# EAGLE board SchematicInkTimePCB (EAGLE 9.7.0)
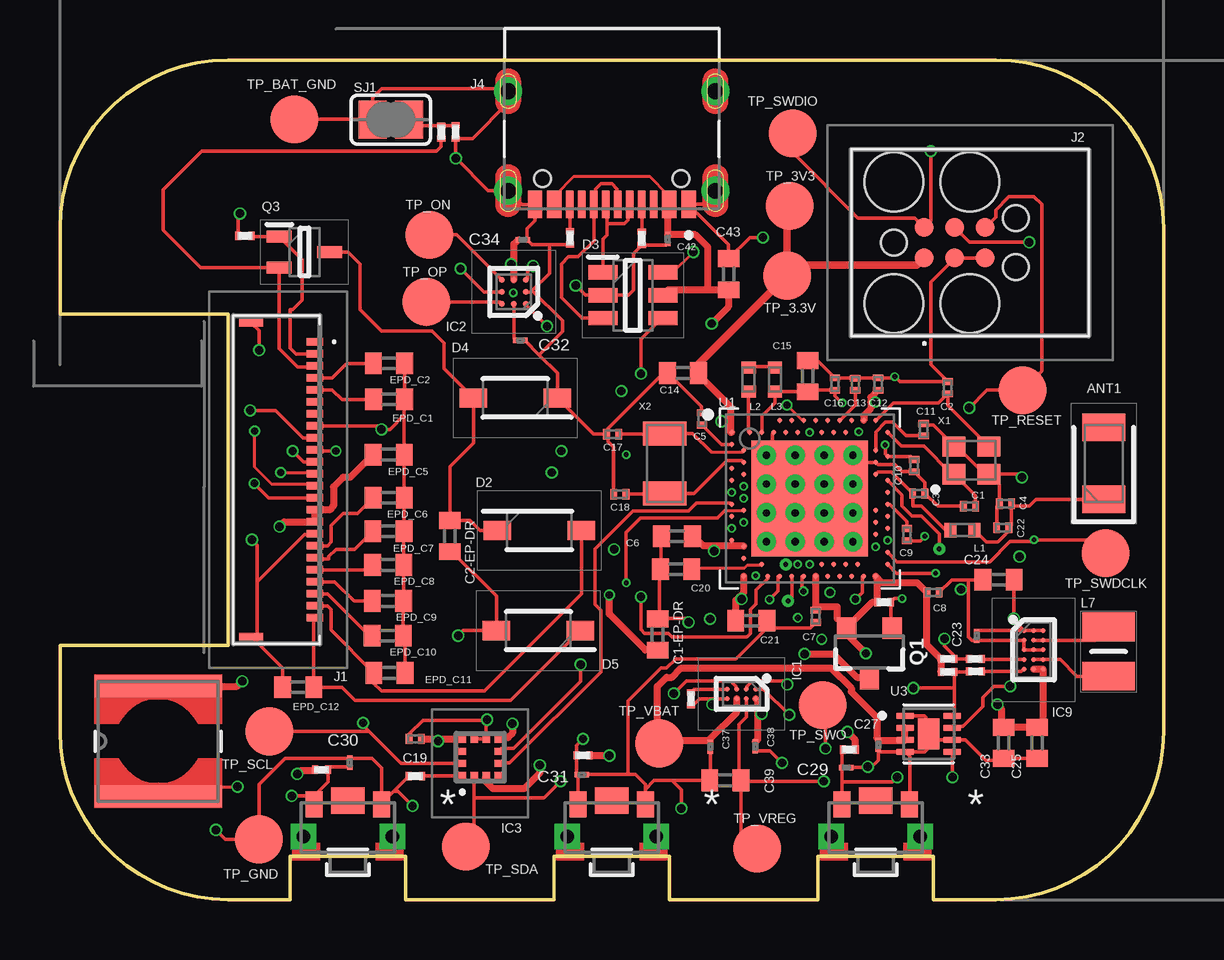
[diagram p0: board, top side]
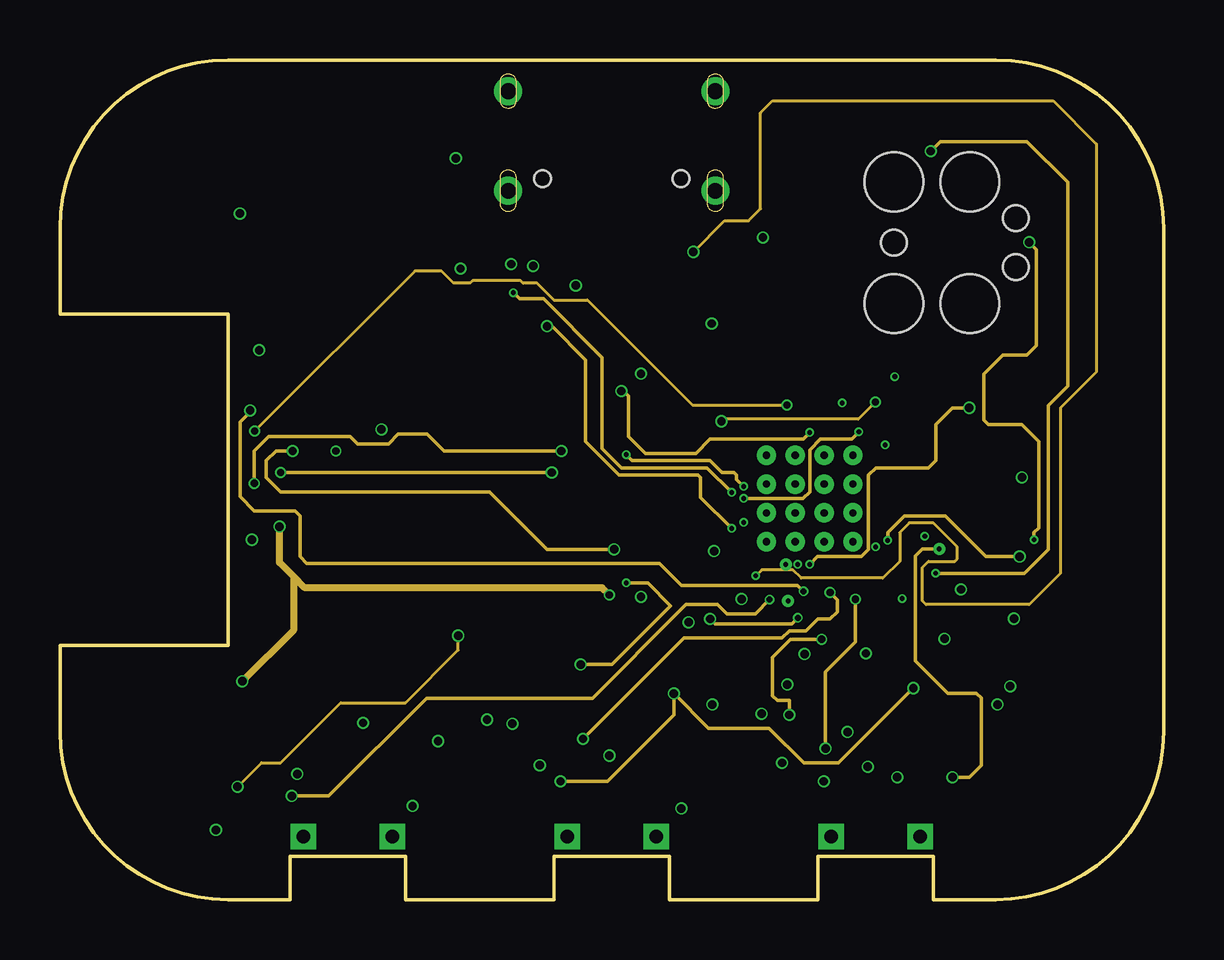
[diagram p1: board, inner layer Route2]
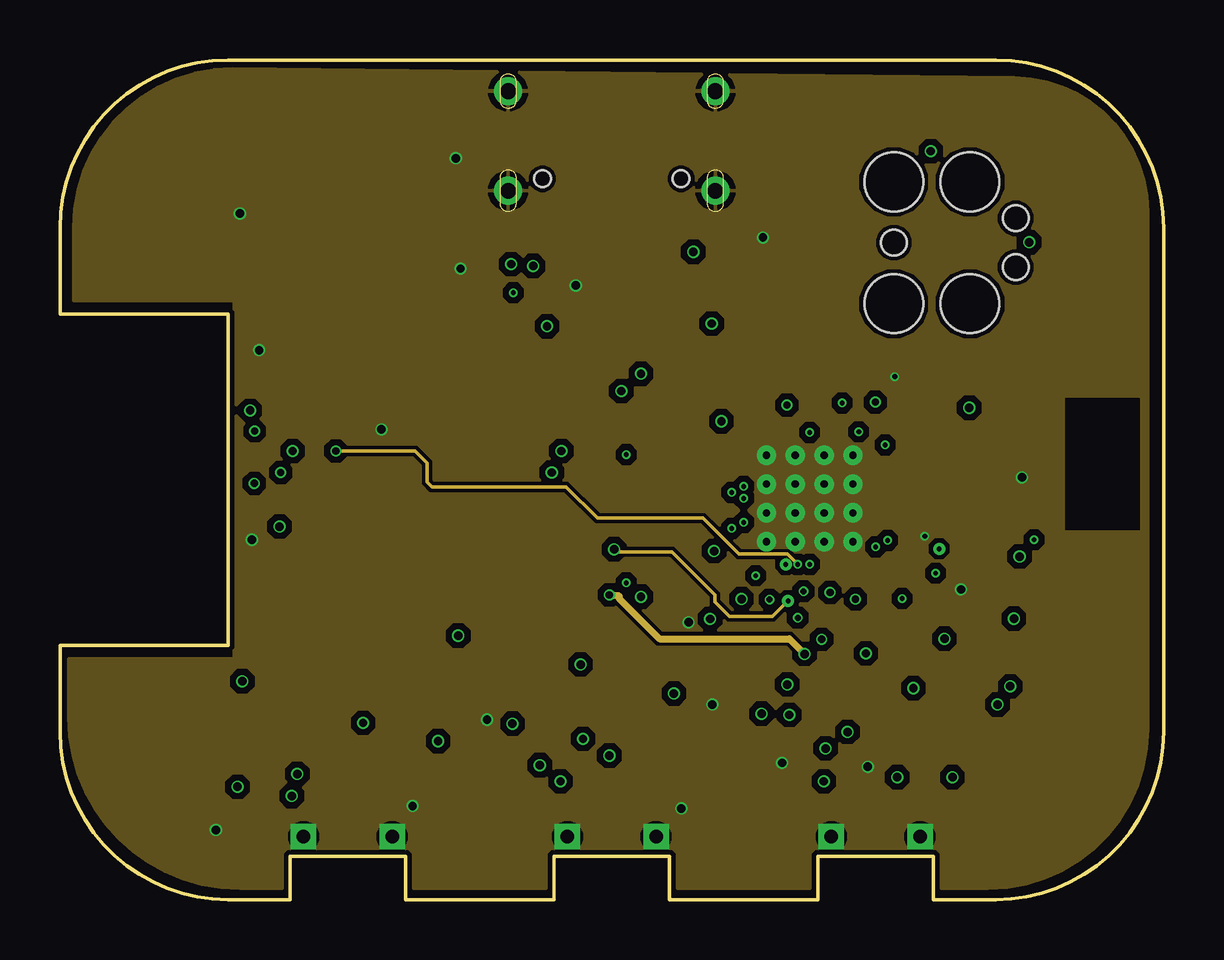
[diagram p2: board, inner layer Route63]
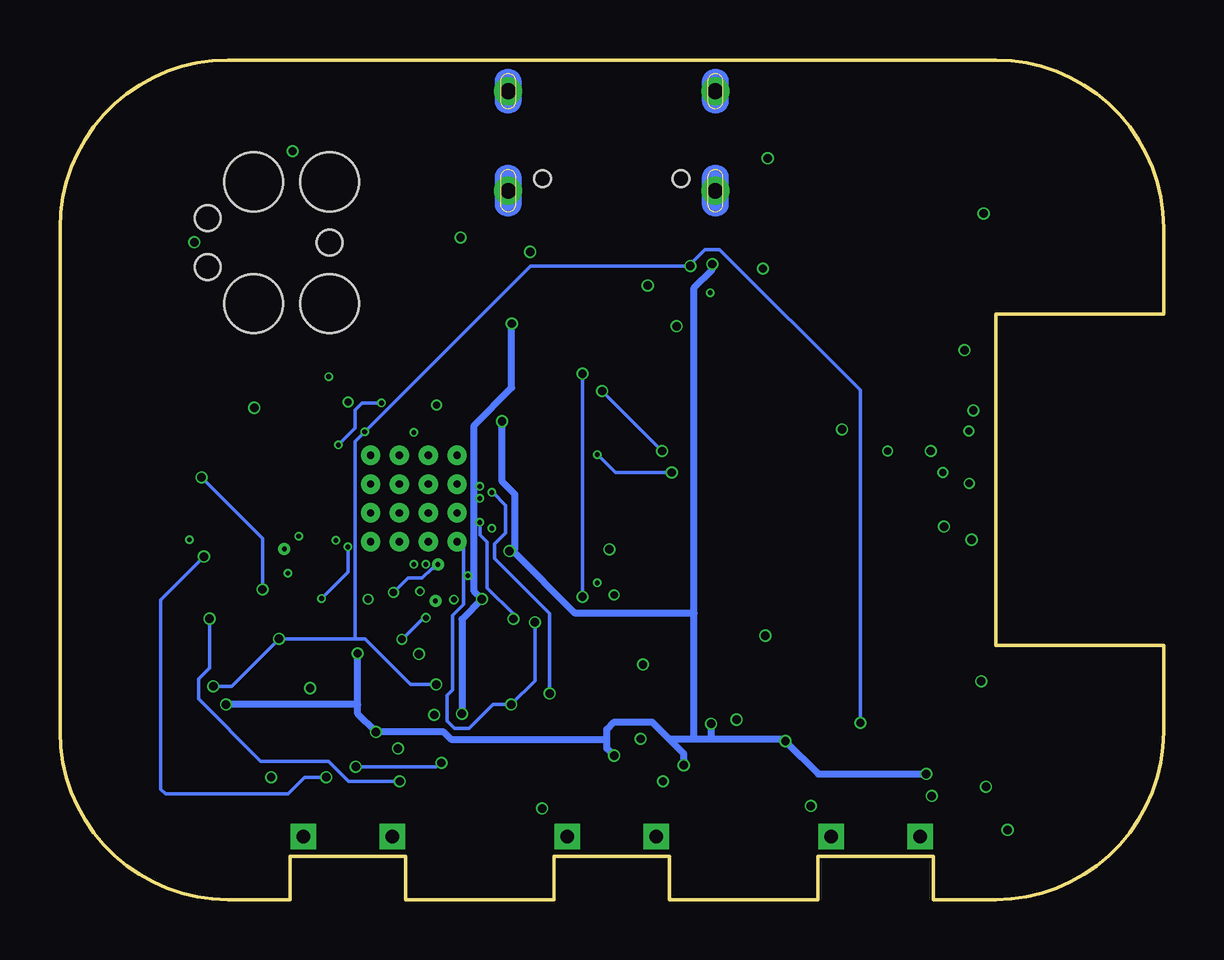
[diagram p3: board, bottom side, seen from below]

Size 46 x 35 mm. Coordinates in mm from the lower left corner, seen from the top.
Outline: 39,0 36.4,0 36.4,1.8 31.6,1.8 31.6,0 25.4,0 25.4,1.8 20.6,1.8 20.6,0 14.4,0 14.4,1.8 9.6,1.8 9.6,0 7,0 arc-90 0,7 0,10.6 7,10.6 7,24.4 0,24.4 0,28 arc-90 7,35 39,35 arc-90 46,28 46,7 arc-90 39,0
Copper layers (1+2*15+16): Top / Route2 / Route63 / Bottom
Stack-up 4 Layer Stack: Top SilkScreen Epoxy Ink / Top SolderMask SR:Green 0.0254mm Dk 4.3 / Top Surface Finish Lead-Free 0.02mm / Top User Defined 0.0151mm / Dielectric-1 User Defined 0.075mm / Dielectric-2 User Defined 0.075mm / Route2 User Defined 0.0145mm / Dielectric-3 User Defined 0.55mm / Route63 User Defined 0.0145mm / Dielectric-4 User Defined 0.075mm / Dielectric-5 User Defined 0.075mm / Bottom User Defined 0.0151mm / Bottom Surface Finish Lead-Free 0.02mm / Bottom SolderMask SR:Green 0.0254mm Dk 4.3 / Bottom SilkScreen Epoxy Ink
Design rules: minimum copper width 5mil, minimum drill size 0.2mm, copper clearance wire_polygon to wire_polygon 0.1mm, copper clearance wire_polygon to pad_smd 0.08mm, copper clearance wire_polygon to via 0.1mm, copper clearance pad_smd to pad_smd 5mil, copper clearance pad_smd to via 5mil, copper clearance via to via 5mil, copper clearance smd to pad (same net) 5mil, copper clearance smd to via (same net) 5mil, copper clearance smd to smd (same net) 5mil, dimension clearance 0.2mm, via restrict clearance 0mil, restrict clearance 0mil, drill distance 6mil, keepout clearance 0mil

## Footprints (pad centres in the part's own frame; a part is rotated, then mirrored left to right if it is on the bottom)
2450AT18B100E_ANTC3216X140N = smd 1.15 x 1.8: 1 -1.5,0; 2 1.5,0
NORDIC_NRF_3_RESC0201_L = smd 0.28 x 0.43: 1 -0.255,0; 2 0.255,0
ESP32_C6_LIBRARY_1_ESP32_WROVER_EAGLE-LTSPICE_C0402 = smd 0.7 x 0.9: 1 -0.65,0; 2 0.65,0
GRM011R60J152KE01L_2_CAPC0201X13N = smd 0.22 x 0.23: 1 -0.185,0; 2 0.185,0
ESP32_C6_LIBRARY_5_SOD3716X135N = smd 1.15 x 0.8: 1 -1.75,0; 2 1.75,0
ESP32_C6_LIBRARY_3_SOT95P280X145-6N = smd 1.2 x 0.6: 1 -1.25,0.95; 2 -1.25,0; 3 -1.25,-0.95; 4 1.25,-0.95; 5 1.25,0; 6 1.25,0.95
BQ25180YBGR_BGA8C40P2X4_100X155X50 = smd 0.2 x 0.2: A1 -0.2,0.6; A2 0.2,0.6; B1 -0.2,0.2; B2 0.2,0.2; C1 -0.2,-0.2; C2 0.2,-0.2; D1 -0.2,-0.6; D2 0.2,-0.6
DRV2605YZFR_BGA9C50P3X3_144X144X62 = smd 0.25 x 0.25: A1 -0.5,0.5; A2 0,0.5; A3 0.5,0.5; B1 -0.5,0; B2 0,0; B3 0.5,0; C1 -0.5,-0.5; C2 0,-0.5; C3 0.5,-0.5
BMA423_BMA423 = smd 0.3 x 0.35: 1 -0.75,-0.775; 2 -0.25,-0.775; 3 0.25,-0.775; 4 0.75,-0.775; 7 0.75,0.775; 8 0.25,0.775; 9 -0.25,0.775; 10 -0.75,0.775 | smd 0.35 x 0.3: 5 0.775,-0.25; 6 0.775,0.25; 11 -0.775,0.25; 12 -0.775,-0.25
RT6160AWSC_BGA15C40P3X5_140X230X60 = smd 0.216 x 0.216: A1 -0.4,0.8; A2 0,0.8; A3 0.4,0.8; B1 -0.4,0.4; B2 0,0.4; B3 0.4,0.4; C1 -0.4,0; C2 0,0; C3 0.4,0; D1 -0.4,-0.4; D2 0,-0.4; D3 0.4,-0.4; E1 -0.4,-0.8; E2 0,-0.8; E3 0.4,-0.8
503480-2400_5034802400 = smd 0.3 x 0.7: 1 -5.75,1.525; 2 -5.25,1.525; 3 -4.75,1.525; 4 -4.25,1.525; 5 -3.75,1.525; 6 -3.25,1.525; 7 -2.75,1.525; 8 -2.25,1.525; 9 -1.75,1.525; 10 -1.25,1.525; 11 -0.75,1.525; 12 -0.25,1.525; 13 0.25,1.525; 14 0.75,1.525; 15 1.25,1.525; 16 1.75,1.525; 17 2.25,1.525; 18 2.75,1.525; 19 3.25,1.525; 20 3.75,1.525; 21 4.25,1.525; 22 4.75,1.525; 23 5.25,1.525; 24 5.75,1.525 | smd 0.3 x 1: MP1 -6.54,-1.125; MP2 6.54,-1.125
TC2030-IDC_TC2030IDC = smd 0.783 x 0.783: 1 -0.953,-0.635; 2 -0.953,0.635; 3 0.317,-0.635; 4 0.317,0.635; 5 1.588,-0.635; 6 1.588,0.635 | hole 2.451: -2.223,-2.54; -2.223,2.54; 0.952,-2.54; 0.952,2.54 | hole 1.067: -2.223,0; 2.857,-1.016; 2.857,1.016
KH-TYPE-C-16P_KINGHELM_KH-TYPE-C-16P = smd 0.6 x 1.15: A1_B12 -3.2,4.725; A4_B9 -2.4,4.725; A9_B4 2.4,4.725; A12_B1 3.2,4.725 | smd 0.3 x 1.15: A5 -1.25,4.725; A6 -0.25,4.725; A7 0.25,4.725; A8 1.25,4.725; B5 1.75,4.725; B6 0.75,4.725; B7 -0.75,4.725; B8 -1.75,4.725 | drill 0.65 pad 1.05: SH1 -4.32,0; SH2 4.32,0; SH3 -4.32,4.15; SH4 4.32,4.15 | hole 0.7: -2.89,3.65; 2.89,3.65
NORDIC_NRF_2_RESC0402_L = smd 0.5 x 0.6: 1 -0.5,0; 2 0.5,0
ESP32_C6_LIBRARY_2_IND_4828-WE-TPC_WRE = smd 0.9 x 5.3: 1 -2.286,0; 2 2.286,0
MLP2016SR47MT0S1_INDC2016X100N = smd 1.2 x 2.2: 1 -1.028,0; 2 1.028,0
ESP32_C6_LIBRARY_4_ESP32_C6_LIBRARY_4_ESP32_C6_LIBRARY_4_ESP32_C6_LIBRARY_4_ESP32_WROVER_SPARKFUN-DISCRETESEMI_SOT23-3 = smd 0.8 x 0.9: 1 -0.95,-1; 2 0.95,-1; 3 0,1.1
ESP32_C6_LIBRARY_6_SOT65P210X110-3N = smd 1.05 x 0.5: 1 -1.05,0.65; 2 -1.05,-0.65; 3 1.05,0
CPF0201D7K68C1_0201 = smd 0.35 x 0.25: 1 0,0.275; 2 0,-0.275
ERA-1AEB3401C_0201 = smd 0.35 x 0.25: 1 0,0.275; 2 0,-0.275
ESP32_C6_LIBRARY_7_JUMPER_SJ = smd 1.168 x 1.6: 1 -0.762,0; 2 0.762,0
2025-10-22_07-23-44_LIBRARY_SW_EVP-AKE31A_PAN = smd 0.711 x 1.092: 1 -1.4,-0.972; 2 1.4,-0.972 | drill 0.559 pad 0.914 square: 3 -1.848,0.381; 4 1.848,0.381 | smd 1.397 x 1.092: 5 0,-1.124
HECTOR_WATCH_1_TP20R = smd 2 x 2: TP 0,0
NORDIC_NRF_4_AQFN50P700X700X85_HS-74N = smd 4.85 x 4.85: P$74 0,0 | drill 0.3 pad 0.6: P$75 -1.8,1.8; P$76 -0.6,1.8; P$77 0.6,1.8; P$78 1.8,1.8; P$79 -1.8,0.6; P$80 -0.6,0.6; P$81 0.6,0.6; P$82 1.8,0.6; P$83 -1.8,-0.6; P$84 -0.6,-0.6; P$85 0.6,-0.6; P$86 1.8,-0.6; P$87 -1.8,-1.8; P$88 -0.6,-1.8; P$89 0.6,-1.8; P$90 1.8,-1.8 | smd 0.2 x 0.2: P$A8 -1.25,3.25; P$A10 -0.75,3.25; P$A12 -0.25,3.25; P$A14 0.25,3.25; P$A16 0.75,3.25; P$A18 1.25,3.25; P$A20 1.75,3.25; P$A22 2.25,3.25; P$A23 2.75,3.25; P$AA24 3.25,-2.25; P$AB2 -2.75,-2.5; P$AC5 -2,-2.75; P$AC9 -1,-2.75; P$AC11 -0.5,-2.75; P$AC13 0,-2.75; P$AC15 0.5,-2.75; P$AC17 1,-2.75; P$AC19 1.5,-2.75; P$AC21 2,-2.75; P$AC24 3.25,-2.75; P$AD2 -2.75,-3.25; P$AD4 -2.25,-3.25; P$AD6 -1.75,-3.25; P$AD8 -1.25,-3.25; P$AD10 -0.75,-3.25; P$AD12 -0.25,-3.25; P$AD14 0.25,-3.25; P$AD16 0.75,-3.25; P$AD18 1.25,-3.25; P$AD20 1.75,-3.25; P$AD22 2.25,-3.25; P$AD23 2.75,-3.25; P$B1 -3.25,2.75; P$B3 -2.5,2.75; P$B5 -2,2.75; P$B7 -1.5,2.75; P$B9 -1,2.75; P$B11 -0.5,2.75; P$B13 0,2.75; P$B15 0.5,2.75; P$B17 1,2.75; P$B19 1.5,2.75; P$B24 3.25,2.75; P$C1 -3.25,2.25; P$D2 -2.75,2; P$D23 2.75,2; P$E24 3.25,1.75; P$F2 -2.75,1.5; P$F23 2.75,1.5; P$G1 -3.25,1.25; P$H2 -2.75,1; P$H23 2.75,1; P$J1 -3.25,0.75; P$J24 3.25,0.75; P$K2 -2.75,0.5; P$L1 -3.25,0.25; P$L24 3.25,0.25; P$M2 -2.75,0; P$N1 -3.25,-0.25; P$N24 3.25,-0.25; P$P2 -2.75,-0.5; P$P23 2.75,-0.5; P$R1 -3.25,-0.75; P$R24 3.25,-0.75; P$T2 -2.75,-1; P$T23 2.75,-1; P$U1 -3.25,-1.25; P$U24 3.25,-1.25; P$V23 2.75,-1.5; P$W1 -3.25,-1.75; P$W24 3.25,-1.75; P$Y2 -2.75,-2; P$Y23 2.75,-2
ESP32_C6_LIBRARY_SON50P200X200X80-9N = smd 0.76 x 0.27: 1 -0.985,0.75; 2 -0.985,0.25; 3 -0.985,-0.25; 4 -0.985,-0.75; 5 0.985,-0.75; 6 0.985,-0.25; 7 0.985,0.25; 8 0.985,0.75 | smd 0.9 x 1.3: 9 0,0
NORDIC_NRF_BT-XTAL_2016_N = smd 0.95 x 0.85: 1 -0.725,-0.575; 2 0.725,-0.575; 3 0.725,0.575; 4 -0.725,0.575
NORDIC_NRF_1_XTAL_3215_N = smd 1 x 1.8: 1 -1.25,0; 2 1.25,0

## Placement (x,y rotation side)
ANT1  2450AT18B100E  [2450AT18B100E_ANTC3216X140N]  43.51,18.18 90 top
C1  12pF  [NORDIC_NRF_3_RESC0201_L]  37.91,16.4 180 top
C1-EP-DR  10uF  [ESP32_C6_LIBRARY_1_ESP32_WROVER_EAGLE-LTSPICE_C0402]  24.91,11.05 90 top
C2  12pF  [NORDIC_NRF_3_RESC0201_L]  37,21.34 90 top
C2-EP-DR  4.7uF/25V  [ESP32_C6_LIBRARY_1_ESP32_WROVER_EAGLE-LTSPICE_C0402]  16.25,15.15 270 top
C3  1pF  [NORDIC_NRF_3_RESC0201_L]  35.8,16.93 0 top
C4  1pF  [NORDIC_NRF_3_RESC0201_L]  39.41,16.5 180 top
C5  100nF  [NORDIC_NRF_3_RESC0201_L]  26.76,20.04 90 top
C6  4.7uF  [ESP32_C6_LIBRARY_1_ESP32_WROVER_EAGLE-LTSPICE_C0402]  25.72,15.15 180 top
C7  100nF  [NORDIC_NRF_3_RESC0201_L]  31.5,11.81 270 top
C8  100nF  [NORDIC_NRF_3_RESC0201_L]  36.39,12.8 0 top
C9  820pF  [NORDIC_NRF_3_RESC0201_L]  35.3,15.21 270 top
C10  N.C.  [NORDIC_NRF_3_RESC0201_L]  35.6,18.09 270 top
C11  100pF  [NORDIC_NRF_3_RESC0201_L]  36,19.59 90 top
C12  100nF  [NORDIC_NRF_3_RESC0201_L]  34.1,21.49 90 top
C13  N.C.  [NORDIC_NRF_3_RESC0201_L]  33.15,21.48 90 top
C14  4.7uF  [ESP32_C6_LIBRARY_1_ESP32_WROVER_EAGLE-LTSPICE_C0402]  25.97,21.95 180 top
C15  1.0uF  [ESP32_C6_LIBRARY_1_ESP32_WROVER_EAGLE-LTSPICE_C0402]  31.17,21.82 90 top
C16  47nF  [NORDIC_NRF_3_RESC0201_L]  32.3,21.49 90 top
C17  12pF  [NORDIC_NRF_3_RESC0201_L]  23.04,19.4 0 top
C18  12pF  [NORDIC_NRF_3_RESC0201_L]  23.34,16.9 0 top
C19  100nF  [NORDIC_NRF_3_RESC0201_L]  14.81,6.7 180 top
C20  4.7uF  [ESP32_C6_LIBRARY_1_ESP32_WROVER_EAGLE-LTSPICE_C0402]  25.68,13.77 180 top
C21  4.7uF  [ESP32_C6_LIBRARY_1_ESP32_WROVER_EAGLE-LTSPICE_C0402]  28.82,11.63 0 top
C22  N.C.  [NORDIC_NRF_3_RESC0201_L]  39.3,15.5 180 top
C23  0.1uF  [GRM011R60J152KE01L_2_CAPC0201X13N]  38.21,10.99 90 top
C24  10uF  [ESP32_C6_LIBRARY_1_ESP32_WROVER_EAGLE-LTSPICE_C0402]  39.12,13.33 0 top
C25  22uF  [ESP32_C6_LIBRARY_1_ESP32_WROVER_EAGLE-LTSPICE_C0402]  40.73,6.53 270 top
C27  0.1uF  [GRM011R60J152KE01L_2_CAPC0201X13N]  34.11,6.45 90 top
C29  1uF  [GRM011R60J152KE01L_2_CAPC0201X13N]  32.77,5.51 180 top
C30  1uF  [GRM011R60J152KE01L_2_CAPC0201X13N]  12.09,5.71 270 top
C31  1uF  [GRM011R60J152KE01L_2_CAPC0201X13N]  21.75,5.21 180 top
C32  1uF  [GRM011R60J152KE01L_2_CAPC0201X13N]  19.19,23.31 180 top
C33  22uF  [ESP32_C6_LIBRARY_1_ESP32_WROVER_EAGLE-LTSPICE_C0402]  39.33,6.53 270 top
C34  0.1uF  [GRM011R60J152KE01L_2_CAPC0201X13N]  19.29,27.51 180 top
C37  1uF  [GRM011R60J152KE01L_2_CAPC0201X13N]  27.11,6.37 90 top
C38  1uF  [GRM011R60J152KE01L_2_CAPC0201X13N]  28.98,6.39 90 top
C39  10uF  [ESP32_C6_LIBRARY_1_ESP32_WROVER_EAGLE-LTSPICE_C0402]  27.73,4.97 180 top
C42  0.1uF  [GRM011R60J152KE01L_2_CAPC0201X13N]  25.34,27.53 270 top
C43  4.7uF  [ESP32_C6_LIBRARY_1_ESP32_WROVER_EAGLE-LTSPICE_C0402]  27.87,26.07 90 top
D2  MBR0530  [ESP32_C6_LIBRARY_5_SOD3716X135N]  19.98,15.39 0 top
D3  USBLC6-2SC6Y  [ESP32_C6_LIBRARY_3_SOT95P280X145-6N]  23.88,25.19 0 top
D4  MBR0530  [ESP32_C6_LIBRARY_5_SOD3716X135N]  18.98,20.91 180 top
D5  MBR0530  [ESP32_C6_LIBRARY_5_SOD3716X135N]  19.94,11.21 180 top
EPD_C1  1uF/50V  [ESP32_C6_LIBRARY_1_ESP32_WROVER_EAGLE-LTSPICE_C0402]  13.72,20.85 180 top
EPD_C2  1uF/50V  [ESP32_C6_LIBRARY_1_ESP32_WROVER_EAGLE-LTSPICE_C0402]  13.71,22.35 180 top
EPD_C5  0.1uF/50V  [ESP32_C6_LIBRARY_1_ESP32_WROVER_EAGLE-LTSPICE_C0402]  13.7,18.55 180 top
EPD_C6  1uF/50V  [ESP32_C6_LIBRARY_1_ESP32_WROVER_EAGLE-LTSPICE_C0402]  13.7,16.75 180 top
EPD_C7  1uF/50V  [ESP32_C6_LIBRARY_1_ESP32_WROVER_EAGLE-LTSPICE_C0402]  13.69,15.35 180 top
EPD_C8  1uF/50V  [ESP32_C6_LIBRARY_1_ESP32_WROVER_EAGLE-LTSPICE_C0402]  13.68,13.95 180 top
EPD_C9  1uF/50V  [ESP32_C6_LIBRARY_1_ESP32_WROVER_EAGLE-LTSPICE_C0402]  13.67,12.45 180 top
EPD_C10  1uF/50V  [ESP32_C6_LIBRARY_1_ESP32_WROVER_EAGLE-LTSPICE_C0402]  13.66,11 180 top
EPD_C11  1uF/50V  [ESP32_C6_LIBRARY_1_ESP32_WROVER_EAGLE-LTSPICE_C0402]  13.73,9.45 180 top
EPD_C12  1uF/50V  [ESP32_C6_LIBRARY_1_ESP32_WROVER_EAGLE-LTSPICE_C0402]  9.93,8.85 0 top
IC1  BQ25180YBGR  [BQ25180YBGR_BGA8C40P2X4_100X155X50]  28.41,8.57 270 top
IC2  DRV2605YZFR  [DRV2605YZFR_BGA9C50P3X3_144X144X62]  18.92,25.33 180 top
IC3  BMA423  [BMA423_BMA423]  17.52,5.93 0 top
IC9  RT6160AWSC  [RT6160AWSC_BGA15C40P3X5_140X230X60]  40.58,10.41 0 top
J1  503480-2400  [503480-2400_5034802400]  9.1,17.5 270 top
J2  TC2030-IDC  [TC2030-IDC_TC2030IDC]  36.98,27.38 0 top
J4  KH-TYPE-C-16P  [KH-TYPE-C-16P_KINGHELM_KH-TYPE-C-16P]  23,33.7 180 top
L1  3.9nH  [NORDIC_NRF_2_RESC0402_L]  37.62,15.4 0 top
L2  10µH  [NORDIC_NRF_2_RESC0402_L]  28.7,21.67 90 top
L3  15nH  [NORDIC_NRF_2_RESC0402_L]  29.8,21.68 270 top
L5  65uH  [ESP32_C6_LIBRARY_2_IND_4828-WE-TPC_WRE]  4.1,6.6 90 top
L7  FTC252012SR47MBCA  [MLP2016SR47MT0S1_INDC2016X100N]  43.71,10.34 270 top
Q1  20V/4.2A/52mΩ/1.4W  [ESP32_C6_LIBRARY_4_ESP32_C6_LIBRARY_4_ESP32_C6_LIBRARY_4_ESP32_C6_LIBRARY_4_ESP32_WROVER_SPARKFUN-DISCRETESEMI_SOT23-3]  33.74,10.32 180 top
Q3  SI1308EDL-T1-GE3  [ESP32_C6_LIBRARY_6_SOT65P210X110-3N]  10.19,26.99 0 top
R1_EP_DR  0.47  [CPF0201D7K68C1_0201]  15.89,31.99 0 top
R1_USB  5K1  [CPF0201D7K68C1_0201]  24.25,27.56 180 top
R2  0  [CPF0201D7K68C1_0201]  38.16,9.51 90 top
R2_EP_DR  10K  [CPF0201D7K68C1_0201]  7.71,27.67 90 top
R2_USB  5K1  [CPF0201D7K68C1_0201]  21.26,27.58 0 top
R3  0  [CPF0201D7K68C1_0201]  14.81,5.14 90 top
R4  0  [CPF0201D7K68C1_0201]  38.15,10.03 90 top
R5  10K  [CPF0201D7K68C1_0201]  10.9,5.41 270 top
R7  10K  [CPF0201D7K68C1_0201]  32.9,6.25 90 top
R8  10K  [CPF0201D7K68C1_0201]  21.8,6.01 90 top
R9  10K  [CPF0201D7K68C1_0201]  26.3,8.37 180 top
R17  3K3  [ERA-1AEB3401C_0201]  37,10.03 90 top
R18  3K3  [ERA-1AEB3401C_0201]  37,9.49 90 top
R_PWR_EPD  10K  [CPF0201D7K68C1_0201]  34.35,12.4 270 top
R_TYPE_SEL  2.2  [CPF0201D7K68C1_0201]  16.49,32 180 top
SJ1  [ESP32_C6_LIBRARY_7_JUMPER_SJ]  13.79,32.51 0 top
SW_DN  2025-10-22_07-23-44_LIBRARY_EVP-AKE31ASW_EVP-AKE31A_PAN  [2025-10-22_07-23-44_LIBRARY_SW_EVP-AKE31A_PAN]  34,3 180 top
SW_ENT  2025-10-22_07-23-44_LIBRARY_EVP-AKE31ASW_EVP-AKE31A_PAN  [2025-10-22_07-23-44_LIBRARY_SW_EVP-AKE31A_PAN]  23,3 180 top
SW_UP  2025-10-22_07-23-44_LIBRARY_EVP-AKE31ASW_EVP-AKE31A_PAN  [2025-10-22_07-23-44_LIBRARY_SW_EVP-AKE31A_PAN]  12,3 180 top
TP_3.3V  HECTOR_WATCH_1_TPTP20R  [HECTOR_WATCH_1_TP20R]  30.31,26.01 0 top
TP_3V3  HECTOR_WATCH_1_TPTP20R  [HECTOR_WATCH_1_TP20R]  30.41,28.91 0 top
TP_BAT_GND  HECTOR_WATCH_1_TPTP20R  [HECTOR_WATCH_1_TP20R]  9.78,32.53 0 top
TP_GND  HECTOR_WATCH_1_TPTP20R  [HECTOR_WATCH_1_TP20R]  8.3,2.51 0 top
TP_ON  HECTOR_WATCH_1_TPTP20R  [HECTOR_WATCH_1_TP20R]  15.39,27.71 0 top
TP_OP  HECTOR_WATCH_1_TPTP20R  [HECTOR_WATCH_1_TP20R]  15.27,24.91 0 top
TP_RESET  HECTOR_WATCH_1_TPTP20R  [HECTOR_WATCH_1_TP20R]  40.12,21.23 0 top
TP_SCL  HECTOR_WATCH_1_TPTP20R  [HECTOR_WATCH_1_TP20R]  8.73,7.01 0 top
TP_SDA  HECTOR_WATCH_1_TPTP20R  [HECTOR_WATCH_1_TP20R]  16.92,2.21 0 top
TP_SWDCLK  HECTOR_WATCH_1_TPTP20R  [HECTOR_WATCH_1_TP20R]  43.58,14.43 0 top
TP_SWDIO  HECTOR_WATCH_1_TPTP20R  [HECTOR_WATCH_1_TP20R]  30.55,31.93 0 top
TP_SWO  HECTOR_WATCH_1_TPTP20R  [HECTOR_WATCH_1_TP20R]  31.79,8.11 0 top
TP_VBAT  HECTOR_WATCH_1_TPTP20R  [HECTOR_WATCH_1_TP20R]  24.98,6.51 0 top
TP_VREG  HECTOR_WATCH_1_TPTP20R  [HECTOR_WATCH_1_TP20R]  29.06,2.13 0 top
U1  NRF52840_QF  [NORDIC_NRF_4_AQFN50P700X700X85_HS-74N]  31.25,16.72 0 top
U3  MAX17048G+T10  [ESP32_C6_LIBRARY_SON50P200X200X80-9N]  36.21,6.91 0 top
X1  32MHz  [NORDIC_NRF_BT-XTAL_2016_N]  37.99,18.31 0 top
X2  32.768kHz  [NORDIC_NRF_1_XTAL_3215_N]  25.21,18.18 270 top

## Library data of the parts
ANT1 = InkTime_v5; ARROW_PART_NUMBER: 2450AT18B100E; ARROW_PRICE-STOCK: https://www.arrow.com/en/products/2450at18b100e/johanson-dielectrics?utm_currency=USD&region=nac; DESCRIPTION: Antennas 2.45GHz ANTENNA; HEIGHT: 1.4mm; MANUFACTURER_NAME: JOHANSON TECHNOLOGY; MANUFACTURER_PART_NUMBER: 2450AT18B100E; MOUSER_PART_NUMBER: 609-2450AT18B100E; MOUSER_PRICE-STOCK: https://www.mouser.co.uk/ProductDetail/Johanson-Technology/2450AT18B100E?qs=yCnrNFeXz%252Bh5MFsFIXGZGA%3D%3D
C1-C5 C7 C8 C11 C12 C16-C19 L1-L3 R1_EP_DR R1_USB R2 R2_EP_DR R2_USB R3-R5 R7-R9 R17 R18 R_PWR_EPD R_TYPE_SEL SJ1 TP_3.3V TP_3V3 TP_BAT_GND TP_GND TP_ON TP_OP TP_RESET TP_SCL TP_SDA TP_SWDCLK TP_SWDIO TP_SWO TP_VBAT TP_VREG U1 X1 X2 = InkTime_v5
C1-EP-DR C2-EP-DR C6 C14 C15 C20 C21 C24 C25 C33 C39 C43 EPD_C1 EPD_C2 EPD_C5-EPD_C12 = InkTime_v5; SPICEMODEL: NONE; SPICEPREFIX: C
C9 C10 C13 C22 = InkTime_v5; DNP: N.C.
C23 C27 C29-C32 C34 C37 C38 C42 = InkTime_v5; AVAILABILITY: In Stock; CHECK_PRICES: https://www.snapeda.com/parts/GRM011R60J152KE01L/Murata/view-part/?ref=eda; DESCRIPTION: SMD Capacitor X5R(EIA) with Capacitance: 1500pF Tol. 10%. Rated Voltage: 6.3Vdc; MF: Murata; MP: GRM011R60J152KE01L; PACKAGE: 0201 Murata; PRICE: None; SNAPEDA_LINK: https://www.snapeda.com/parts/GRM011R60J152KE01L/Murata/view-part/?ref=snap
D2 D4 D5 = InkTime_v5; AVAILABILITY: In Stock; CHECK_PRICES: https://www.snapeda.com/parts/MBR0530/Onsemi/view-part/?ref=eda; DESCRIPTION: Diode Schottky 30 V 500mA Surface Mount SOD-123; MF: ON Semiconductor; MP: MBR0530; PACKAGE: SOD-123-2 ON Semiconductor; PRICE: None; PURCHASE-URL: https://www.snapeda.com/api/url_track_click_mouser/?unipart_id=179458&manufacturer=ON Semiconductor&part_name=MBR0530&search_term=None; SNAPEDA_LINK: https://www.snapeda.com/parts/MBR0530/Onsemi/view-part/?ref=snap
D3 = InkTime_v5; AVAILABILITY: In Stock; CHECK_PRICES: https://www.snapeda.com/parts/USBLC6-2SC6Y/STMicroelectronics/view-part/?ref=eda; DESCRIPTION: 17V Clamp 5A (8/20µs) Ipp Tvs Diode Surface Mount SOT-23-6; MF: STMicroelectronics; MP: USBLC6-2SC6Y; PACKAGE: SOT-23-6 STMicroelectronics; PRICE: None; SNAPEDA_LINK: https://www.snapeda.com/parts/USBLC6-2SC6Y/STMicroelectronics/view-part/?ref=snap
IC1 = InkTime_v5; ARROW_PART_NUMBER: BQ25180YBGR; ARROW_PRICE-STOCK: https://www.arrow.com/en/products/bq25180ybgr/texas-instruments?utm_currency=USD&region=nac; DESCRIPTION: Charger IC Lithium Ion/Polymer, Lithium Iron Phosphate 8-DSBGA (1.6x1.1); HEIGHT: 0.5mm; MANUFACTURER_NAME: Texas Instruments; MANUFACTURER_PART_NUMBER: BQ25180YBGR; MOUSER_PART_NUMBER: 595-BQ25180YBGR; MOUSER_PRICE-STOCK: https://www.mouser.co.uk/ProductDetail/Texas-Instruments/BQ25180YBGR?qs=doiCPypUmgEWjAK%252BJAX6Tw%3D%3D
IC2 = InkTime_v5; ARROW_PART_NUMBER: DRV2605YZFR; ARROW_PRICE-STOCK: https://www.arrow.com/en/products/drv2605yzfr/texas-instruments?region=nac; DESCRIPTION: Haptic Driver for ERM/LRA with Built-In Library and Smart Loop Architecture; HEIGHT: 0.625mm; MANUFACTURER_NAME: Texas Instruments; MANUFACTURER_PART_NUMBER: DRV2605YZFR
IC3 = InkTime_v5; ARROW_PART_NUMBER: BMA423; ARROW_PRICE-STOCK: https://www.arrow.com/en/products/bma423/bosch; DESCRIPTION: Accelerometers Triaxial low-g 12bit Acceleration Sensor; HEIGHT: 1mm; MANUFACTURER_NAME: BOSCH; MANUFACTURER_PART_NUMBER: BMA423; MOUSER_PART_NUMBER: 262-BMA423; MOUSER_PRICE-STOCK: https://www.mouser.co.uk/ProductDetail/Bosch-Sensortec/BMA423?qs=HXFqYaX1Q2xC%252BSgeGoX3mg%3D%3D
IC9 = InkTime_v5; DESCRIPTION: Buck-Boost Regulator Positive Output Step-Up/Step-Down I2C DC-DC Controller IC 15-WL-CSP (BSC) (1.4x2.3); HEIGHT: 0.6mm; MANUFACTURER_NAME: RICHTEK; MANUFACTURER_PART_NUMBER: RT6160AWSC; MOUSER_PART_NUMBER: 835-RT6160AWSC; MOUSER_PRICE-STOCK: https://www.mouser.co.uk/ProductDetail/Richtek/RT6160AWSC?qs=amGC7iS6iy%2FLd9PSoixZXQ%3D%3D
J1 = InkTime_v5; DESCRIPTION: FFC & FPC Connectors 0.5mm FPC RA SMT Dual Contact 24Ckt; HEIGHT: 1.87mm; MANUFACTURER_NAME: Molex; MANUFACTURER_PART_NUMBER: 503480-2400; MOUSER_PART_NUMBER: 538-503480-2400; MOUSER_PRICE-STOCK: https://www.mouser.co.uk/ProductDetail/Molex/503480-2400?qs=OAhjpuo3Vu7efIoxFh9AOw%3D%3D
J2 = InkTime_v5; DESCRIPTION: CABLE ADAPTER 6 POS; HEIGHT: 19mm; MANUFACTURER_NAME: Tag Connect; MANUFACTURER_PART_NUMBER: TC2030-IDC
J4 = InkTime_v5; AVAILABILITY: Not in stock; CHECK_PRICES: https://www.snapeda.com/parts/KH-TYPE-C-16P/Kinghelm/view-part/?ref=eda; MF: kinghelm; MP: KH-TYPE-C-16P; PACKAGE: None; PRICE: None; SNAPEDA_LINK: https://www.snapeda.com/parts/KH-TYPE-C-16P/Kinghelm/view-part/?ref=snap
L5 = InkTime_v5; COPYRIGHT: Copyright (C) 2024 Ultra Librarian. All rights reserved.; MANUFACTURER_PART_NUMBER: 744043680; MFR_NAME: Wurth Electronics
L7 = InkTime_v5; DESCRIPTION: SMD / SMT Inductors (Coils), L=0.47?H, L x W x T :; HEIGHT: 1mm; JLCPCB: https://jlcpcb.com/partdetail/6763488-FTC252012SR47MBCA/C5832368; MANUFACTURER_NAME: TDK; MANUFACTURER_PART_NUMBER: FTC252012SR47MBCA
Q1 = InkTime_v5; ATTR: DMG2305UX-7; PROD_ID: TRAN-14388
Q3 = InkTime_v5; AVAILABILITY: In Stock; CHECK_PRICES: https://www.snapeda.com/parts/SI1308EDL-T1-GE3/Vishay+Siliconix/view-part/?ref=eda; DESCRIPTION: Si1308EDL-T1-GE3 N-channel MOSFET Transistor, 1.5 A, 30 V, 3-Pin SC-70 | Siliconix / Vishay SI1308EDL-T1-GE3; MF: Vishay Siliconix; MP: SI1308EDL-T1-GE3; PACKAGE: SOT-323 Vishay Semiconductor; PRICE: None; PURCHASE-URL: https://www.snapeda.com/api/url_track_click_mouser/?unipart_id=274603&manufacturer=Vishay Siliconix&part_name=SI1308EDL-T1-GE3&search_term=None; SNAPEDA_LINK: https://www.snapeda.com/parts/SI1308EDL-T1-GE3/Vishay+Siliconix/view-part/?ref=snap
SW_DN SW_ENT SW_UP = InkTime_v5; COPYRIGHT: Copyright (C) 2025 Ultra Librarian. All rights reserved.; DIGI-KEY_PART_NUMBER_1: P123437TR-ND; DIGI-KEY_PART_NUMBER_2: P123437CT-ND; DIGI-KEY_PART_NUMBER_3: P123437DKR-ND; MANUFACTURER_NAME: Panasonic; MANUFACTURER_PART_NUMBER: EVP-AKE31A
U3 = InkTime_v5; AVAILABILITY: In Stock; CHECK_PRICES: https://www.snapeda.com/parts/MAX17048G+T10/Analog+Devices/view-part/?ref=eda; DESCRIPTION: 3µA 1-Cell/2-Cell Fuel Gauge with ModelGauge; MF: Analog Devices; MP: MAX17048G+T10; PACKAGE: TDFN-8 Maxim; PRICE: None; PURCHASE-URL: https://www.snapeda.com/api/url_track_click_mouser/?unipart_id=329239&manufacturer=Analog Devices&part_name=MAX17048G+T10&search_term=None; SNAPEDA_LINK: https://www.snapeda.com/parts/MAX17048G+T10/Analog+Devices/view-part/?ref=snap

## Nets
3V3 [POWER]: C6.1 C7.1 C8.1 C12.1 C14.1 C19.1 C25.1 C33.1 C34.2 IC2.C2 IC3.3 IC3.7 IC3.10 IC9.E2 IC9.E3 J2.1 Q1.2 R5.2 R7.2 R8.2 R17.1 R18.1 R_PWR_EPD.2 TP_3.3V.TP TP_3V3.TP U1.P$A22 U1.P$AD14 U1.P$AD23 U1.P$B1 U1.P$W1 U1.P$Y2
ALERT: U1.P$J24 U3.5
D+: D3.4 U1.P$AD6
D-: D3.6 U1.P$AD4
DEC1: C5.1 U1.P$C1
DEC3: C11.1 U1.P$D23
DEC4_6: C10.1 C15.1 C16.1 L3.2 U1.P$B5 U1.P$E24
DN: D3.1 J4.A7 J4.B7
DP: D3.3 J4.A6 J4.B6
EPD_3V3 [POWER]: C1-EP-DR.1 EPD_C5.2 J1.15 J1.16 L5.2 Q1.3
EPD_BUSY: J1.9 U1.P$AD12
EPD_CS: J1.12 U1.P$K2
EPD_DC: J1.11 U1.P$AD10
EPD_RST: J1.10 U1.P$AC11
GDR: J1.2 Q3.1 R2_EP_DR.2
GND: C1-EP-DR.2 C1.2 C2.2 C3.2 C4.2 C5.2 C6.2 C7.2 C8.2 C9.2 C10.2 C11.2 C12.2 C13.2 C14.2 C15.2 C16.2 C17.1 C18.1 C19.2 C20.2 C21.2 C22.2 C23.1 C24.1 C25.2 C27.1 C29.1 C30.1 C31.1 C32.1 C33.2 C34.1 C37.1 C38.1 C39.2 C42.2 C43.2 D3.2 D4.1 EPD_C1.1 EPD_C2.1 EPD_C5.1 EPD_C6.1 EPD_C7.1 EPD_C8.1 EPD_C9.1 EPD_C10.1 EPD_C11.1 EPD_C12.1 IC1.D2 IC2.B1 IC2.B3 IC3.8 IC3.9 IC9.B1 IC9.C1 IC9.C2 IC9.C3 J1.8 J1.17 J1.MP1 J1.MP2 J2.3 J2.5 J4.A1_B12 J4.A12_B1 J4.SH1 J4.SH2 J4.SH3 J4.SH4 R1_USB.1 R2_EP_DR.1 R2_USB.2 R3.1 R9.1 R_TYPE_SEL.1 SJ1.1 SW_DN.1 SW_ENT.1 SW_UP.1 TP_BAT_GND.TP TP_GND.TP U1.P$74 U1.P$75 U1.P$76 U1.P$77 U1.P$78 U1.P$79 U1.P$80 U1.P$81 U1.P$82 U1.P$83 U1.P$84 U1.P$85 U1.P$86 U1.P$87 U1.P$88 U1.P$89 U1.P$90 U1.P$B7 U1.P$F23 U3.1 U3.4 U3.6 U3.9 X1.2 X1.4
HAPTIC_EN: IC2.A1 U1.P$U1
IMU_INT1: IC3.5 U1.P$N1
IMU_INT2: IC3.6 U1.P$P2
LX1: IC9.B2 IC9.B3 L7.1
LX2: IC9.D2 IC9.D3 L7.2
MOSI: J1.14 U1.P$B13
N$1: IC1.D1 R9.2
N$2: IC9.D1 R4.2
N$3: IC9.E1 R2.2
N$4: IC3.1 R3.2
N$5: C20.1 U1.P$AC5
N$6: C13.1 U1.P$A18
N$7: L2.2 L3.1
N$8: L2.1 U1.P$B3
N$9: C2.1 U1.P$A23 X1.3
N$10: C3.1 L1.1 U1.P$H23
N$11: C1.1 U1.P$B24 X1.1
N$12: C32.2 IC2.A2
N$13: J4.A5 R1_USB.2
N$14: C2-EP-DR.2 D5.2 L5.1
N$15: C2-EP-DR.1 D2.1 D4.2 Q3.3
N$16: EPD_C2.2 J1.4
N$17: EPD_C1.2 J1.5
N$19: C9.1 U1.P$N24
N$22: EPD_C6.2 J1.18
N$23: EPD_C7.2 J1.19
N$24: R1_EP_DR.1 R_TYPE_SEL.2 SJ1.2
N$25: EPD_C8.2 J1.20
N$26: EPD_C9.2 J1.21
N$27: EPD_C10.2 J1.22
N$29: J4.B5 R2_USB.1
OUT+: IC2.A3 TP_OP.TP
OUT-: IC2.C3 TP_ON.TP
P0.00/XL1: C17.2 U1.P$D2 X2.1
P0.01/XL2: C18.2 U1.P$F2 X2.2
P0.04: U1.P$J1
P0.09: U1.P$L24
P0.13: C30.2 R5.1 SW_UP.2 U1.P$AD8
P0.14: C31.2 R8.1 SW_ENT.2 U1.P$AC9
P0.19: U1.P$AC15
P0.20: U1.P$AD16
P0.21: U1.P$AC17
P0.22: U1.P$AD18
P0.23: U1.P$AC19
P0.24: U1.P$AD20
P0.25: U1.P$AC21
P0.26: U1.P$G1
P0.27: U1.P$H2
P0.28: U1.P$B11
P0.29: U1.P$A10
P0.30: U1.P$B9
P0.31: U1.P$A8
P1.01: Q1.1 R_PWR_EPD.1 U1.P$Y23
P1.02: C29.2 R7.1 SW_DN.2 U1.P$W24
P1.03: U1.P$V23
P1.04: U1.P$U24
P1.05: U1.P$T23
P1.06: U1.P$R24
P1.07: U1.P$P23
P1.09: U1.P$R1
P1.10: U1.P$A20
P1.11: U1.P$B19
P1.12: U1.P$B17
P1.13: U1.P$A16
P1.14: U1.P$B15
P1.15: U1.P$A14
PMIC_INT: IC1.A1 U1.P$T2
PREVGH: D5.1 EPD_C12.2 J1.24
PREVGL: D2.2 EPD_C11.2 J1.23
RESE: J1.3 Q3.2 R1_EP_DR.2
RESET: J2.6 TP_RESET.TP U1.P$AC13
RF: ANT1.1 C4.1 C22.1 L1.2
SCK: J1.13 U1.P$A12
SCL: IC1.B1 IC2.C1 IC3.12 R4.1 R17.2 TP_SCL.TP U1.P$M2 U3.7
SDA: IC1.C1 IC2.B2 IC3.2 R2.1 R18.2 TP_SDA.TP U1.P$L1 U3.8
SWDCLK: J2.4 TP_SWDCLK.TP U1.P$AA24
SWDIO: J2.2 TP_SWDIO.TP U1.P$AC24
SWO: TP_SWO.TP U1.P$AD22
VBAT [POWER]: C27.2 C37.2 IC1.C2 TP_VBAT.TP U3.2 U3.3
VBUS [POWER]: C21.1 C38.2 C42.1 C43.1 D3.5 IC1.A2 J4.A4_B9 J4.A9_B4 U1.P$AD2
VREG: C23.2 C24.2 C39.1 IC1.B2 IC9.A1 IC9.A2 IC9.A3 TP_VREG.TP

## Tracks (layer width: path | path; a pad name or v marks a point on that pad's centre or on a via)
3V3  (via drill 0.3, 0.35)
  Top 0.127: U1.P$W1 28.02,14.96 28.02,14.76 | v33.99,20.74 33.8,20.74
  Top 0.3: IC2.C2 18.92,26.49 | 18.92,26.49 18.92,27.32 C34.2 | IC9.E2 IC9.E3 40.98,7.43 C25.1 C33.1 39.23,7.29 39.23,7.97 v39.08,8.13 | Q1.2 33.87,12.4 R_PWR_EPD.2 34.08,13.39 U1.P$AD23 34.27,13.2 35.73,13.2 C8.1 36.13,10.62 R17.1 36.72,9.96 R18.1 | Q1.2 32.4,11.71 32.4,12.2 31.63,12.2 C7.1 U1.P$AD14 | C19.1 15.76,6.7 | 15.76,6.7 IC3.10 | C12.1 33.8,20.93 33.8,20.74 33.8,20.47 33.5,20.17 U1.P$A22 | IC3.3 17.74,5.08 17.74,4.93 18.05,4.62 19.34,4.62 20,5.28 v20,5.6 | 27.95,19.94 27.95,20.55 26.66,21.84 C14.1 | 27.95,19.94 27.95,19.48 U1.P$B1 | 27.27,14.76 26.81,14.76 26.43,15.14 C6.1 | 27.27,14.76 28.02,14.76 28.49,14.76 U1.P$Y2 | v9.89,5.23 10.05,5.38 10.58,5.38 R5.2 | v15.76,6.6 15.76,6.7 | v32.83,6.98 33.13,6.68 33.13,6.3 R7.2 | v18.86,7.33 18.86,6.93 18.68,6.76 18.28,6.76 IC3.7 | v33.59,10.26 32.83,11.02 32.83,11.18 Q1.2 | v18.81,26.49 18.92,26.49 | v27.27,14.53 27.27,14.76 | v27.57,19.94 27.95,19.94 | R8.2 v22.89,6.01 v22.9,6
  Top 0.305: TP_3V3.TP 30.31,28.81 TP_3.3V.TP | TP_3.3V.TP 30.75,26.45 35.73,26.45 J2.1 | TP_3.3V.TP 26.62,22.32 C14.1
  Route2 0.127: v33.99,20.74 33.27,20.03 27.57,20.03 v27.57,19.94
  Bottom 0.3: v9.89,5.23 14.39,5.23 v15.76,6.6 15.84,6.68 18.86,6.68 | 18.86,6.68 19.57,6.68 | 19.57,6.68 20.6,6.68 | 23.2,6.68 29.71,6.68 30.01,6.98 v32.83,6.98 33.59,7.75 33.59,8.13 | v18.86,7.33 18.86,6.68 | 33.59,8.13 v33.59,10.26 | v18.81,26.49 18.81,26.26 19.57,25.5 19.57,11.94 | 19.57,6.68 19.57,11.94 | 19.57,11.94 24.52,11.94 27.12,14.53 v27.27,14.53 27.04,14.6 27.04,16.89 27.57,17.42 v27.57,19.94 | 33.59,8.13 v39.08,8.13 | v22.9,6 23.2,6.3 23.2,6.68 | v20,5.6 20,6.08 20.6,6.68 | 23.2,6.68 23.2,7.1 22.9,7.4 21.32,7.4 20.6,6.68
ALERT  (via drill 0.2 pad 0.5, 0.35)
  Top 0.152: U1.P$J24 35.1,16.87 35.1,16.4 35.5,16 35.9,16 36.65,15.25 v36.65,14.62 | v37.2,5.1 U3.5
  Route2 0.152: v36.65,14.62 35.95,14.62 35.65,14.32 35.65,9.95 37,8.6 38.2,8.6 38.4,8.4 38.4,5.6 37.9,5.1 v37.2,5.1
D+  (via drill 0.35)
  Top 0.152: U1.P$AD6 29.5,13.38 29.02,12.9 29.02,12.32 28.79,12.09 28.79,11.1 28.64,10.95 25.52,10.95 25.36,11.1 24.37,11.1 24.22,11.25 v24.22,12.62 | v24.22,21.92 24.22,23.37 25.06,24.21 D3.4
  Bottom 0.152: v24.22,21.92 v24.22,12.62
D-  (via drill 0.2, 0.35)
  Top 0.127: D3.6 25.54,26.14 v26.4,27 | U1.P$AD4 v29,13.5
  Route2 0.127: v26.4,27 27.7,28.3 28.7,28.3 29.2,28.8 29.2,32.8 29.7,33.3 41.4,33.3 43.2,31.5 43.2,22 41.7,20.5 41.7,13.6 40.4,12.3 36.1,12.3 35.95,12.45 35.95,13.85 36.2,14.1 37.3,14.1 37.4,14.2 37.4,14.7 36.4,15.7 35.4,15.7 35,15.3 35,14.1 34.3,13.4 30.9,13.4 30.55,13.75 29.25,13.75 v29,13.5
DEC1
  Top 0.152: C5.1 27.57,18.97 U1.P$C1
DEC3
  Top 0.152: C11.1 35.27,19.34 34.7,19.9 34.4,19.9 34,19.5 U1.P$D23
DEC4_6  (via drill 0.2)
  Top 0.152: C10.1 35.48,18.47 U1.P$E24 34.4,18.57 v34.4,18.95 | U1.P$B5 29.25,20.15 29.8,20.7 L3.2 C15.1 31.23,21.23 C16.1 32.3,21 v32.6,20.7
  Bottom 0.152: v34.4,18.95 33.7,19.65 33.7,20.4 33.4,20.7 v32.6,20.7
DN
  Top 0.15: D3.1 22.63,27.53 22.8,27.7 22.8,28.17 22.8,28.93 J4.A7
  Top 0.152: 22.8,28.17 23.53,28.17 23.69,28.32 23.69,28.93 J4.B7
DP
  Top 0.152: D3.3 21.76,24.24 20.9,25.1 20.9,26.5 21.2,26.8 21.6,26.8 22.25,27.45 J4.B6 22.31,29.01 22.31,29.62 22.54,29.84 23,29.84 23.23,29.62 23.23,29.01 J4.A6
EPD_3V3  (via drill 0.3, 0.35, 0.35 pad 0.5)
  Top 0.3: EPD_C5.2 12.1,17.6 11.8,17.6 11.4,17.2 11.4,16.4 11.25,16.25 J1.15 J1.16 9.35,15.75 v9.15,15.55 | C1-EP-DR.1 24.4,10.4 22.9,11.9 v22.9,12.7 | v31.04,10.24 32.24,10.24 33.21,9.27 33.67,9.27 Q1.3 | L5.2 7.39,8.89 v7.6,9.1
  Route2 0.3: v22.9,12.7 22.6,13 10.2,13 9.75,13.45 | 9.75,13.45 9.15,14.05 v9.15,15.55 | v7.6,9.1 9.75,11.25 9.75,13.45
  Route63 0.3: v31.04,10.24 30.41,10.87 24.98,10.87 23.3,12.55 23.3,12.65 v22.9,12.7
EPD_BUSY  (via drill 0.25, 0.35)
  Top 0.152: v31,12.85 30.93,12.92 30.93,13.46 U1.P$AD12 | J1.9 10.12,19.25 8.98,20.39 v7.93,20.39
  Route2 0.152: v7.93,20.39 7.93,20.33 7.5,19.9 7.5,16.8 8.1,16.2 9.8,16.2 10,16 10,14.3 10.28,14.02 24.98,14.02 25.9,13.1 30.75,13.1 v31,12.85
EPD_CS  (via drill 0.2, 0.3, 0.35)
  Top 0.127: v9.2,17.8 10.57,17.8 J1.12
  Route2 0.15: U1.P$K2 28.2,17.52 28.2,17.7 28.1,17.8 27.6,17.8 27.1,18.3 23.85,18.3 v23.6,18.55
  Route2 0.152: v20.5,17.8 v9.2,17.8
  Bottom 0.15: v23.6,18.55 22.85,17.8 v20.5,17.8
  other vias: 28.5,17.22
EPD_DC  (via drill 0.2 pad 0.5, 0.35 pad 0.5)
  Top 0.152: U1.P$AD10 30.5,12.6 v30.35,12.45 | J1.11 10.15,18.25 v9.7,18.7
  Route2 0.152: v23.1,14.6 20.3,14.6 17.9,17 9.2,17 8.6,17.6 8.6,18.3 9,18.7 v9.7,18.7
  Route63 0.152: v30.35,12.45 29.7,11.8 27.9,11.8 27.3,12.4 27.3,12.7 25.5,14.5 23.1,14.5 v23.1,14.6
EPD_RST  (via drill 0.2, 0.3)
  Top 0.152: v11.5,18.7 10.68,18.7 J1.10
  Route63 0.152: U1.P$AC11 30.32,14.4 28.3,14.4 26.8,15.9 22.4,15.9 21.1,17.2 15.5,17.2 15.3,17.4 15.3,18.2 14.8,18.7 v11.5,18.7
  other vias: 30.75,13.97
GDR
  Top 0.152: J1.2 9.85,22.75 9.6,23 9.6,24.6 9.7,24.6 10.1,25 10.1,26.68 Q3.1 8.02,27.64 R2_EP_DR.2
GND  (via drill 0.2, 0.2 pad 0.2, 0.35, 0.35 pad 0.5)
  Top 0.15: J1.MP2 8.18,10.76 9.28,9.66 EPD_C12.1 | IC9.C3 IC9.C2 IC9.C1 IC9.B1 C23.1 | C8.2 37.17,13.33 37.86,13.33 C24.1 | C7.2 31.27,11.33 29.77,11.33 C21.2 | C37.1 27.11,5 C39.2 25.5,4.97 | 24.9,4.97 25.5,4.97 | IC3.9 IC3.8 17.77,7.47 v17.8,7.5 | C38.1 29.59,6.21 v30.1,5.7 | 25.5,4.97 25.9,4.57 v25.9,3.8 | C42.2 25.28,27.29 R1_USB.1
  Top 0.152: 13.9,4.5 13.4,4.01 SW_UP.1 13.4,5.5 13.01,5.89 C30.1 9.38,5.89 8.3,4.81 TP_GND.TP 6.89,2.51 v6.5,2.9 | 13.9,4.5 R3.1 | TP_BAT_GND.TP 13.01,32.53 SJ1.1 13.03,33.43 13.4,33.8 18.58,33.8 J4.SH2 18.68,33.22 17.19,31.73 R_TYPE_SEL.1 v16.49,30.91 v16.5,30.9 17.85,29.55 J4.SH4 19.25,28.98 J4.A12_B1 19.8,28.3 19.48,27.98 C34.1 19.68,27.3 20.4,27.3 | R2_EP_DR.1 7.44,28.54 v7.5,28.6 | J1.MP1 8.3,23.71 v8.3,22.9 | X1.2 39.16,17.3 C4.2 39.05,16.39 C22.2 | X1.2 39.97,17.73 v40.1,17.6 | C1.2 36.59,16.4 C3.2 36.05,17.38 C10.2 35.1,17.84 34.8,18.14 34.09,18.14 U1.P$F23 32.75,18.22 U1.P$74 | J4.SH3 27.32,29.42 26.9,29 26.23,29 J4.A1_B12 27.87,27.3 C43.2 28.75,27.6 v29.3,27.6 | R2_USB.2 20.4,27.3 | R1_USB.1 23.9,26.94 23.9,25.4 23.69,25.19 D3.2 21.91,25.19 v21.5,25.6 | C29.1 33.67,5.51 | 33.67,5.51 33.81,5.51 34.11,5.81 C27.1 34.22,6.16 U3.4 | U3.4 36.06,6.16 36.3,6.4 36.3,6.82 U3.9 | U3.9 36.1,7.02 36.1,7.6 36.04,7.66 U3.1 | U3.9 36.46,6.66 U3.6 37.74,6.66 38.6,5.8 39.25,5.8 C33.2 C25.2 | SW_DN.1 35.42,4 35.42,5.96 U3.4 | C31.1 23.69,5.21 | 23.69,5.21 23.99,5.21 24.4,4.8 24.4,4.6 | 24.4,4.6 SW_ENT.1 | 24.4,4.6 24.77,4.97 24.9,4.97 | EPD_C11.1 14.38,10.93 EPD_C10.1 EPD_C9.1 EPD_C8.1 EPD_C7.1 EPD_C6.1 EPD_C5.1 14.35,20.2 | 14.35,20.2 14.35,20.83 EPD_C1.1 EPD_C2.1 | 14.35,20.2 13.75,19.6 v13.4,19.6 13.25,19.75 J1.8 | IC2.B3 17.67,25.33 v16.7,26.3 | IC2.B1 19.63,25.33 19.69,25.39 | 19.69,25.39 20.4,26.1 20.4,27.3 | C32.1 19.98,22.71 | 19.98,22.71 20.73,21.95 D4.1 22.24,19.4 C17.1 | U1.P$80 U1.P$76 | U1.P$74 31.25,17.92 U1.P$77 | U1.P$81 U1.P$78 | U1.P$81 U1.P$82 | U1.P$74 U1.P$81 | U1.P$74 U1.P$80
  Top 0.152: U1.P$80 U1.P$79 | U1.P$74 30.05,16.72 U1.P$83 | U1.P$74 U1.P$84 | U1.P$74 32.45,16.72 U1.P$86 | U1.P$74 U1.P$90 | U1.P$74 U1.P$85 U1.P$89 | U1.P$74 31.25,15.52 U1.P$88 | U1.P$74 U1.P$87 | J2.5 J2.3 36.3,25.75 36.3,22.3 C2.2 35.01,21.59 v34.8,21.8 34.74,21.75 C12.2 C13.2 C16.2 31.57,22.47 C15.2 | 13.9,4.5 14.1,4.5 v14.7,3.9 | C19.2 14.55,6.9 15.12,7.47 17.77,7.47 | C6.2 25.06,15.14 25.06,13.84 C20.2 24.98,13.77 24.98,11.71 C1-EP-DR.2 25.06,11.71 26.05,11.71 v26.2,11.56 | C5.2 26.73,20.32 26.73,20.55 25.36,21.92 C14.2 25.29,21.92 25.13,21.92 22.85,19.63 22.85,19.41 C17.1 | 37.86,13.33 37.86,12.93 | 37.86,12.93 37.86,10.95 38.01,10.79 38.16,10.79 C23.1 | C18.1 23.08,16.97 23.08,18.87 22.85,19.1 22.85,19.33 C17.1 | 27.19,8.36 26.66,8.36 26.35,8.05 R9.1 | 27.19,8.36 27.8,8.36 IC1.D2 | U1.P$B7 29.71,19.41 29.71,18.8 29.48,18.57 U1.P$75 | C11.2 36.03,19.79 36.41,19.79 37.25,18.95 X1.4 37.33,18.95 38.47,17.8 38.7,17.8 X1.2 | 8.22,13.23 10.2,15.21 10.58,15.21 J1.17 | 8.22,13.23 8.22,10.79 8.18,10.76 | v27.19,8.13 27.19,8.36 | 19.98,22.71 20.94,23.67 20.94,24.13 19.69,25.39 | v37.55,12.93 37.86,12.93 | 23.69,5.21 23.69,8.28 25.06,9.65 25.29,9.65 25.67,10.03 28.18,10.03 29.4,11.25 29.4,11.56 C21.2 | v33.67,5.54 33.67,5.51 | C9.2 35.86,14.96 v36.05,15.15 | 8.22,13.23 8.22,14.78 v8,15
  Bottom 0.152: U1.P$87 29.4,14.91 29.17,14.68 29.17,12.3 29.63,11.84 29.63,8.74 29.86,8.51 29.86,7.44 29.55,7.14 28.94,7.14 27.95,8.13 v27.19,8.13 26.2,9.12 v26.2,11.56 | v37.55,12.93 37.55,15.06 40.07,17.58 v40.1,17.6 | v33.67,5.54 30.32,5.54 30.16,5.69 v30.1,5.7
  pour Route63: 7.2,34.7 arc90 0.5,28 0.5,24.9 7.2,24.9 7.2,10.1 0.3,10.1 0.3,7.6 arc90 7.5,0.4 38.7,0.4 arc90 45.4,7.1 45.4,28.66 arc89 39.81,34.32
HAPTIC_EN  (via drill 0.2 pad 0.2, 0.35 pad 0.2)
  Top 0.152: v20.3,23.9 19.42,24.78 IC2.A1
  Route2 0.152: U1.P$U1 26.7,16.77 26.7,17.6 26.6,17.7 23.3,17.7 21.9,19.1 21.9,22.5 20.5,23.9 v20.3,23.9
  other vias: 28,15.47
IMU_INT1
  Top 0.152: U1.P$N1 27.94,16.53 26.53,16.53 26.2,16.2 23.88,16.2 22.3,14.62 22.3,12.3 22.54,12.06 22.54,9.5 18.73,5.69 18.35,5.69 IC3.5
IMU_INT2  (via drill 0.2, 0.35)
  Top 0.127: 27.72,16.22 U1.P$P2
  Top 0.152: IC3.6 18.41,6.3 18.9,6.3 21.7,9.1 v21.7,9.8 | v23.6,13.2 23.6,15.3 24.2,15.9 27.4,15.9 27.72,16.22
  Route2 0.152: v21.7,9.8 23,9.8 25.45,12.25 24.5,13.2 v23.6,13.2
LX1
  Top 0.15: IC9.B2 IC9.B3
  Top 0.152: L7.1 43.15,10.81 IC9.B3
LX2
  Top 0.15: IC9.D2 IC9.D3
  Top 0.152: L7.2 42.39,9.31 41.69,10.01 IC9.D3
MOSI  (via drill 0.2, 0.3, 0.35)
  Top 0.152: v8.1,17.35 8.7,16.75 J1.14
  Route2 0.152: U1.P$B13 30.98,19.2 27.1,19.2 26.5,18.6 24.4,18.6 23.7,19.3 23.7,21 23.5,21.2 v23.4,21.2 | v20.9,18.7 16,18.7 15.3,19.4 14.1,19.4 13.7,19 12.4,19 12.1,19.3 8.7,19.3 8.1,18.7 v8.1,17.35
  Bottom 0.152: v23.4,21.2 v20.9,18.7
  other vias: 31.25,19.47
N$1
  Top 0.152: IC1.D1 26.43,8.77 R9.2
N$2
  Top 0.15: IC9.D1 38.45,10.01 R4.2
N$3
  Top 0.15: IC9.E1 40.08,9.51 R2.2
N$4
  Top 0.152: R3.2 15.1,5.15 IC3.1
N$5
  Top 0.127: U1.P$AC5 29.22,13.94 28.65,13.94 28.52,13.82 26.37,13.82 C20.1
N$6
  Top 0.152: C13.1 33.15,20.62 U1.P$A18
N$7
  Top 0.152: L2.2 28.71,22.22 29.78,22.22 L3.1
N$8
  Top 0.152: L2.1 28.7,19.52 U1.P$B3
N$9
  Top 0.15: X1.3 37,20.6 C2.1 36.62,20.7 34.73,20.7 U1.P$A23
N$10
  Top 0.152: U1.P$H23 34.1,17.82 34.66,17.82 C3.1 35.55,16.4 35.9,16.4 36.9,15.4 L1.1
N$11
  Top 0.152: C1.1 38.16,16.84 X1.1 37.16,17.73 36,18.9 35.07,18.9 U1.P$B24
N$12
  Top 0.15: IC2.A2 18.92,23.39 C32.2
N$13
  Top 0.15: R1_USB.2 J4.A5
N$14  (via drill 0.35 pad 0.5)
  Top 0.127: L5.1 4.49,4.7 v7.4,4.7
  Top 0.15: v16.6,11 16.81,11.21 D5.2
  Top 0.152: C2-EP-DR.2 16.35,14.5 18.19,12.66 D5.2
  Route2 0.127: v7.4,4.7 8.4,5.7 9.2,5.7 11.7,8.2 14.4,8.2 16.6,10.4 v16.6,11
N$15
  Top 0.152: Q3.3 12.01,26.99 12.5,26.5 12.5,24.6 13.4,23.7 15.5,23.7 16,23.2 16,22.14 D4.2 17.23,19.03 16.25,18.05 C2-EP-DR.1 17.1,15.8 17.51,15.39 D2.1
N$16
  Top 0.152: EPD_C2.2 11.95,22.35 11.35,21.75 J1.4
N$17
  Top 0.152: EPD_C1.2 11.75,20.85 11.35,21.25 J1.5
N$19
  Top 0.152: C9.1 35.3,15.77 34.59,16.47 U1.P$N24
N$22
  Top 0.15: EPD_C6.2 12.4,16.1 11.8,16.1 11.3,15.6 11.3,14.9 11.15,14.75 J1.18
N$23
  Top 0.15: EPD_C7.2 12.29,14.6 11.5,14.6 11.2,14.3 11.2,14.2 10.68,14.2 J1.19
N$24
  Top 0.152: R_TYPE_SEL.2 16.48,32.27 R1_EP_DR.1 14.8,32.27 SJ1.2
N$25
  Top 0.15: EPD_C8.2 12.83,13.75 J1.20
N$26
  Top 0.15: EPD_C9.2 12.25,12.45 11.45,13.25 J1.21
N$27
  Top 0.15: EPD_C10.2 12.9,11 11.15,12.75 J1.22
N$29
  Top 0.152: R2_USB.1 J4.B5
OUT+
  Top 0.152: TP_OP.TP 18.34,24.91 IC2.A3
OUT-
  Top 0.152: TP_ON.TP 16.54,27.71 IC2.C3
P0.00/XL1
  Top 0.127: 27.15,18.65 28.43,18.65
  Top 0.152: C17.2 25.18,19.4 X2.1 26.37,19.43 27.15,18.65 | 28.43,18.65 U1.P$D2
P0.01/XL2
  Top 0.152: C18.2 25.18,16.9 X2.2 26.43,16.93 27.8,18.3 28.42,18.3 U1.P$F2
P0.13  (via drill 0.25, 0.35)
  Top 0.15: 10.62,4 SW_UP.2
  Top 0.152: C30.2 11.29,5.53 R5.1 11.18,4.91 10.62,4.36 10.62,4 | v29.58,12.5 29.93,12.85 29.93,13.46 U1.P$AD8 | v9.66,4.32 10.58,4.32 SW_UP.2
  Route2 0.152: v9.66,4.32 11.2,4.32 15.28,8.39 22.2,8.39 25.85,12.05 26.1,12.3 27.4,12.3 27.8,11.9 28.98,11.9 v29.58,12.5
P0.14  (via drill 0.2 pad 0.5, 0.3, 0.35)
  Top 0.152: SW_ENT.2 21.6,5.18 C31.2 21.52,5.25 R8.1 21.52,6.43 v21.8,6.7
  Route2 0.152: v21.8,6.7 26,10.9 30.1,10.9 30.4,11.2 31.1,11.2 31.6,11.7 32.1,11.7 32.4,12 32.4,12.5 v32.1,12.8
  Bottom 0.152: v32.1,12.8 31.5,13.4 30.9,13.4 30.5,13.8 30.42,13.8 U1.P$AC9
  other vias: 30.25,13.97
P1.01  (via drill 0.2)
  Top 0.152: 34.66,11.33 Q1.1 34.62,11.38 R_PWR_EPD.1 34.77,12.55 v35.1,12.55 | U1.P$Y23 v34,14.7
  Bottom 0.152: v35.1,12.55 34,13.65 v34,14.7
P1.02  (via drill 0.2, 0.35)
  Top 0.15: 32.59,4.9 C29.2 32.59,6.21 R7.1 | 32.59,4.9 32.59,3.99 SW_DN.2 | v34.9,5.1 34.7,4.9 32.59,4.9
  Route2 0.15: U1.P$W24 34.5,15.3 35.2,16 36.9,16 38.6,14.3 v40,14.3
  Bottom 0.15: v40,14.3 41.8,12.5 41.8,4.6 41.6,4.4 36.5,4.4 35.8,5.1 v34.9,5.1
  other vias: 34.5,14.97
PMIC_INT  (via drill 0.2, 0.25, 0.3, 0.35)
  Top 0.152: IC1.A1 29.33,8.77 v30.4,7.7
  Route2 0.152: v30.4,7.7 30.4,8.3 29.9,8.3 29.7,8.5 29.7,10.1 30.45,10.85 v31.75,10.85 | v30.75,11.75 30.5,11.5 27.3,11.5 v27.1,11.7
  Bottom 0.152: v31.75,10.85 30.85,11.75 v30.75,11.75 | v27.1,11.7 27.1,11.9 28.2,13 28.2,14.9 28.5,15.2 U1.P$T2
  other vias: 28.5,15.72
PREVGH
  Top 0.15: EPD_C12.2 10.58,11.71 J1.24
  Top 0.152: D5.1 18.78,8.3 12.3,8.3 11.75,8.85 EPD_C12.2
PREVGL
  Top 0.15: EPD_C11.2 11.3,11.23 11.3,12.1 11.15,12.25 J1.23
  Top 0.152: D2.2 21.73,12.73 17.7,8.7 13.4,8.7 13.08,9.02 EPD_C11.2
RESE
  Top 0.152: J1.3 10.57,22.2 9.9,22.2 9.14,22.96 Q3.2 5.86,26.34 4.3,27.9 4.3,29.6 5.9,31.2 15.7,31.2 15.89,31.39 R1_EP_DR.2
RESET  (via drill 0.2, 0.35)
  Top 0.152: J2.6 39,28.45 39,28.75 39.55,29.3 40.6,29.3 40.92,28.98 40.92,22.03 TP_RESET.TP 38.63,21.23 v37.9,20.5
  Route2 0.152: U1.P$AC13 31.58,14.3 33.4,14.3 33.7,14.6 33.7,17.7 34,18 36.2,18 36.5,18.3 36.5,19.8 37.2,20.5 v37.9,20.5
  other vias: 31.25,13.97
RF
  Top 0.152: ANT1.1 40.68,16.68 40.4,16.4 39.77,16.4 C4.1 39.66,15.61 C22.1 39.55,15.36 39.1,14.9 38.62,14.9 L1.2
SCK  (via drill 0.3)
  Top 0.127: v30.3,20.61 30.94,19.98 U1.P$A12 | v8.12,19.53 8.12,18.03 8.84,17.31 10.62,17.31 J1.13
  Route2 0.127: v30.3,20.61 26.37,20.61 21.98,24.99 20.59,24.99 19.89,25.69 19.31,25.69 19.2,25.8 17.2,25.8 17.1,25.7 16.4,25.7 15.9,26.2 14.79,26.2 v8.12,19.53
SCL  (via drill 0.2, 0.35)
  Top 0.15: R4.1 37.4,10.03 R17.2
  Top 0.152: TP_SCL.TP 12.89,7.01 | 12.89,7.01 12.59,7.31 v12.64,7.37 | 12.89,7.01 14.22,5.68 IC3.12 | v30.32,8.97 30.16,9.12 28.87,9.12 28.64,8.89 28.64,8.81 IC1.B1 | v36.87,10.87 36.87,10.57 37.4,10.03 | v19.72,26.41 19.5,26.19 19.5,25.88 IC2.C1 | v39.61,8.89 38.93,8.89 38.47,8.43 38.47,8.05 37.63,7.21 37.25,7.21 U3.7
  Route2 0.152: v33.3,19.5 33,19.2 31.7,19.2 31.25,18.75 31.25,17 30.97,16.72 U1.P$M2
  Bottom 0.152: v30.32,8.97 31.38,8.97 33.29,10.87 33.69,10.87 | 33.69,10.87 v36.87,10.87 38.85,8.89 v39.61,8.89 | 19.8,26.41 26.38,26.41 v33.3,19.5 33.69,19.1 33.69,10.87 | v12.64,7.37 12.64,21.23 18.5,27.1 19.11,27.1 19.8,26.41 | 19.8,26.41 v19.72,26.41
  other vias: 28.5,16.72
SDA  (via drill 0.2 pad 0.2, 0.35)
  Top 0.15: R2.1 37.87,9.49 R18.2 37.27,8.81 37.27,7.74 U3.8
  Top 0.152: IC3.2 17.27,4.24 | 17.27,4.24 17.27,2.56 TP_SDA.TP | IC2.B2 v18.9,25.31 v18.9,25.3 | v25.59,8.59 26.12,9.12 27.95,9.12 28.18,8.89 28.18,8.81 IC1.C1 | v35.57,8.81 37.27,8.81 | 17.27,4.24 20.18,4.24 v20.87,4.93
  Route2 0.152: U1.P$L1 26.97,18 23.4,18 22.6,18.8 22.6,22.6 20.15,25.05 19.15,25.05 v18.9,25.3 | v35.57,8.81 32.45,5.69 31,5.69 29.55,7.14 27.04,7.14 v25.59,8.59 25.59,7.69 22.83,4.93 v20.87,4.93
  Bottom 0.152: v25.59,8.59 25.59,11.94 27.88,14.22 27.88,14.83 27.42,15.29 27.42,16.43 27.95,16.97 U1.P$L1
  other vias: 28,16.97
SWDCLK  (via drill 0.2 pad 0.2, 0.35 pad 0.2)
  Top 0.15: 39.6,14.93 38.75,14.08 34.89,14.08 U1.P$AA24
  Top 0.152: J2.4 37.91,27.4 v40.4,27.4 | 39.6,14.93 40.53,14.93 v40.6,15 43.01,15 TP_SWDCLK.TP
  Route2 0.152: v40.4,27.4 40.7,27.1 40.7,23.1 40.3,22.7 39.3,22.7 38.5,21.9 38.5,20 38.7,19.8 40.1,19.8 40.8,19.1 40.8,15.5 40.6,15.3 v40.6,15
SWDIO  (via drill 0.2 pad 0.2, 0.35 pad 0.2)
  Top 0.152: TP_SWDIO.TP 30.55,31.13 33.27,28.41 35.63,28.41 J2.2 36.3,28.29 v36.3,31.2 | v36.5,13.6 34.87,13.6 U1.P$AC24
  Route2 0.152: v36.3,31.2 36.7,31.6 40.3,31.6 42,29.9 42,21.4 41.2,20.6 41.2,14.6 40.2,13.6 v36.5,13.6
SWO  (via drill 0.3, 0.35)
  Top 0.152: v33.16,12.52 33.44,12.8 33.44,13.46 U1.P$AD22 | v31.91,6.3 31.91,7.97 31.84,8.05 TP_SWO.TP
  Route2 0.152: v33.16,12.52 33.16,10.74 31.91,9.5 v31.91,6.3
VBAT
  Top 0.3: IC1.C2 28.21,7.81 27.11,6.71 C37.2 27.05,6.61 25.08,6.61 TP_VBAT.TP 25.06,6.76 24.91,6.91 24.91,8.89 25.29,9.27 25.52,9.27 25.9,9.65 32.14,9.65 32.98,8.81 32.98,8.66 34.05,7.59 34.05,6.76 C27.2 35.2,6.63 U3.3 U3.2
VBUS  (via drill 0.35)
  Top 0.127: J4.A9_B4 20.65,28.99 20.65,29.37 21.41,30.14 24.59,30.14 25.35,29.37 25.35,29.12 J4.A4_B9
  Top 0.3: J4.A4_B9 25.34,28.91 C42.1 26.48,27.71 27,27.2 27,25.42 | D3.5 25.36,25.42 27,25.42 | 27,25.42 C43.1 27.86,24.7 v27.17,24.01 | 29.08,7.75 29.08,8.3 IC1.A2 | 29.08,7.75 29.08,6.68 C38.2 | C21.1 28.17,12.47 28.32,12.62 | 28.32,12.62 28.5,12.8 U1.P$AD2 | v29.25,7.75 29.08,7.75 | v28.41,12.52 28.32,12.62
  Bottom 0.3: v29.25,7.75 29.25,11.68 v28.41,12.52 28.74,12.85 28.74,19.76 27.17,21.33 v27.17,24.01
VREG  (via drill 0.35)
  Top 0.15: C23.2 38.24,11.21 IC9.A1 | IC9.A1 IC9.A2 IC9.A3 | IC9.A1 39.77,11.62 v39.77,11.71 C24.2 | IC1.B2 28.61,7.61 28.3,7.3 28.3,5.05 C39.1 28.38,2.81 TP_VREG.TP
  Top 0.152: v31.84,4.93 28.41,4.93 C39.1 | v39.76,11.71 v39.77,11.71
  Bottom 0.152: v39.76,11.71 39.76,9.65 40.22,9.19 40.22,8.36 37.63,5.77 34.81,5.77 33.97,4.93 v31.84,4.93
(copper drawn outside any net)
  shapes: Bottom area x1, Route2 area x1, Route63 area x1, Top area x1